# Allegro board gumstix_expansion_v1_3.brd
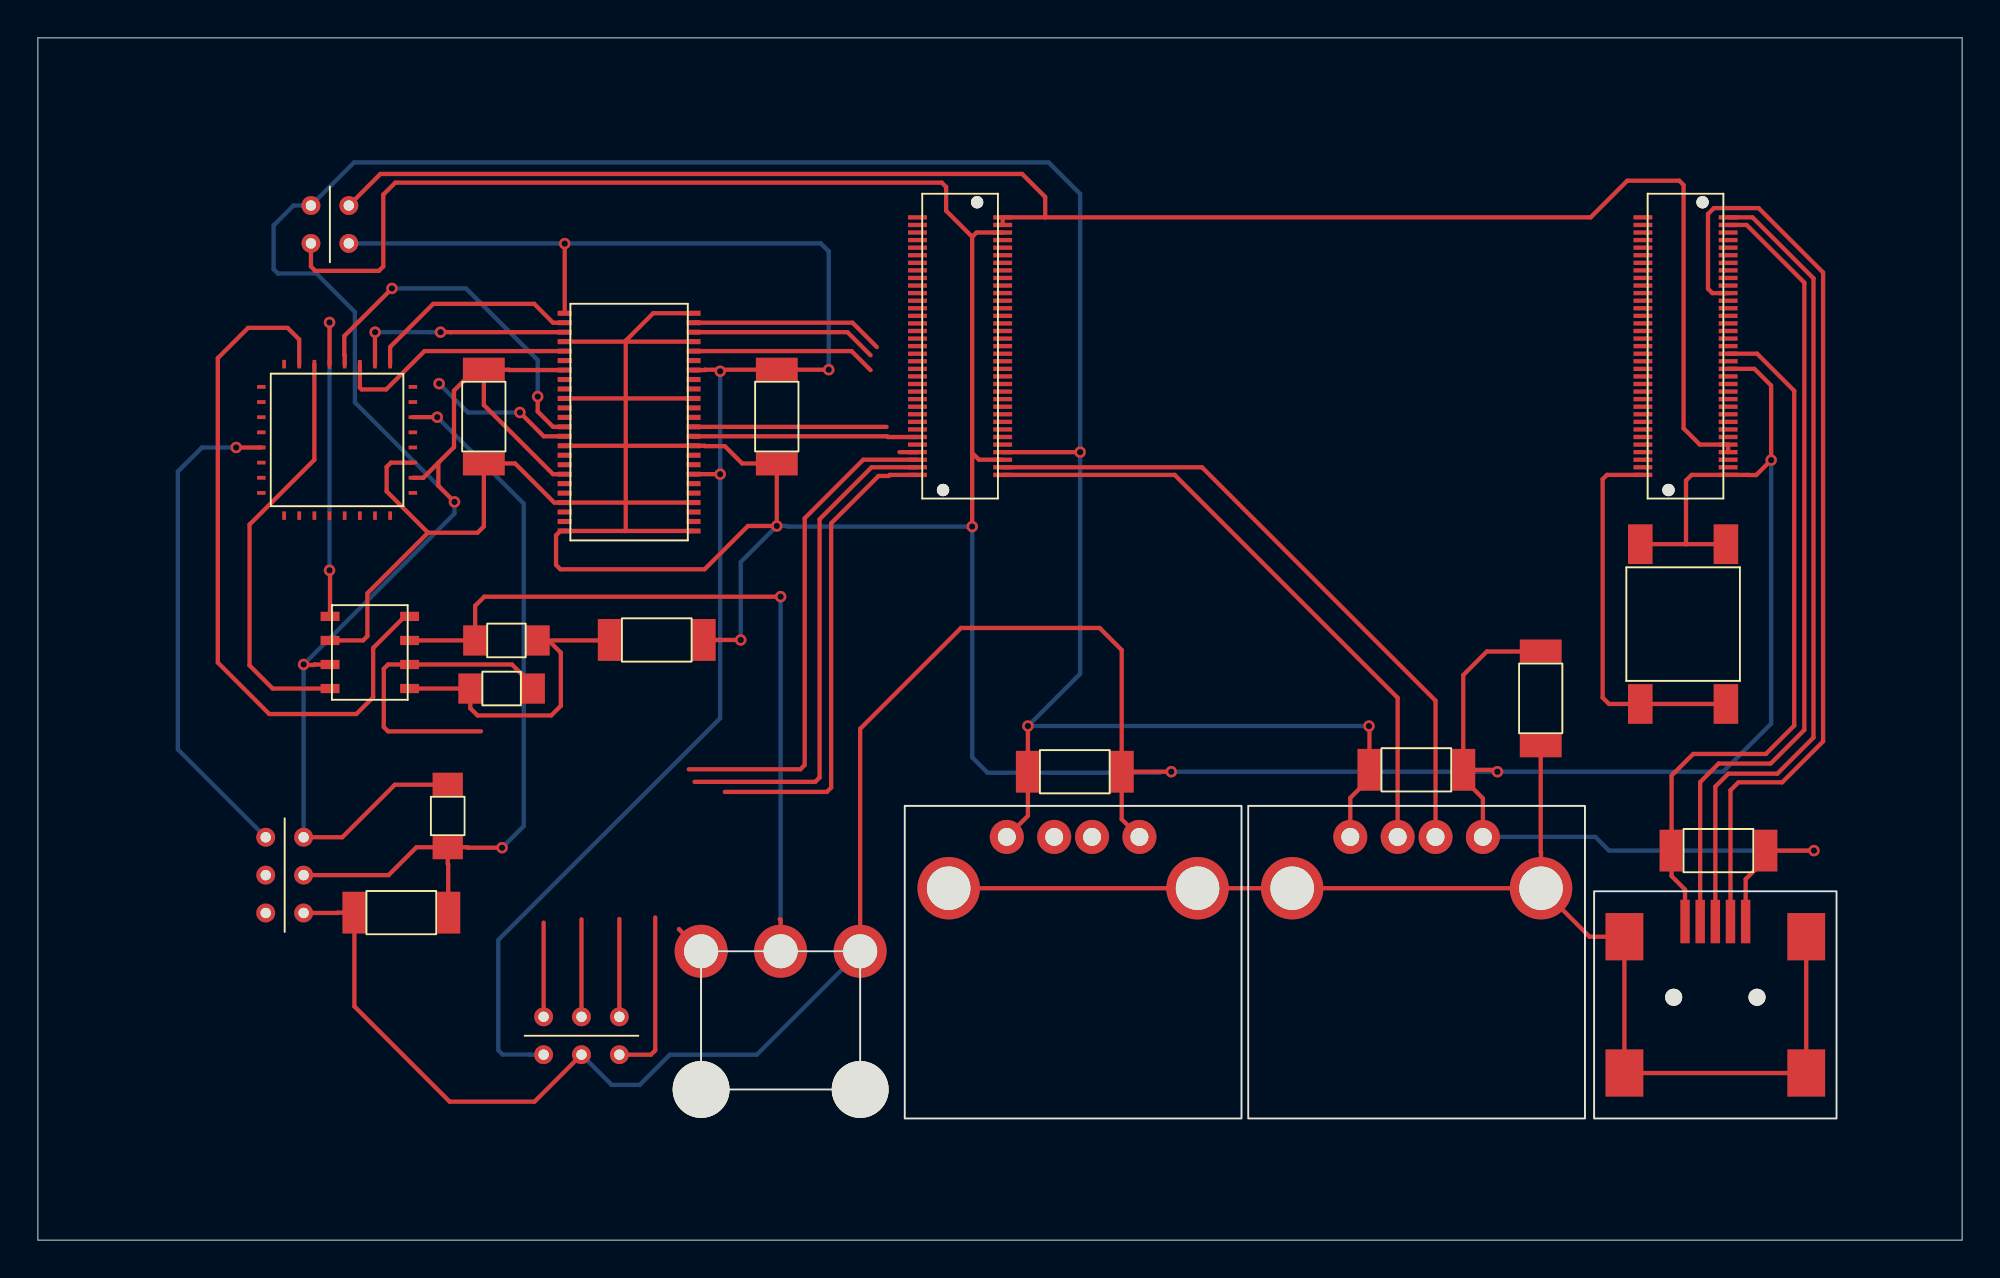
[diagram p0: board, top side]
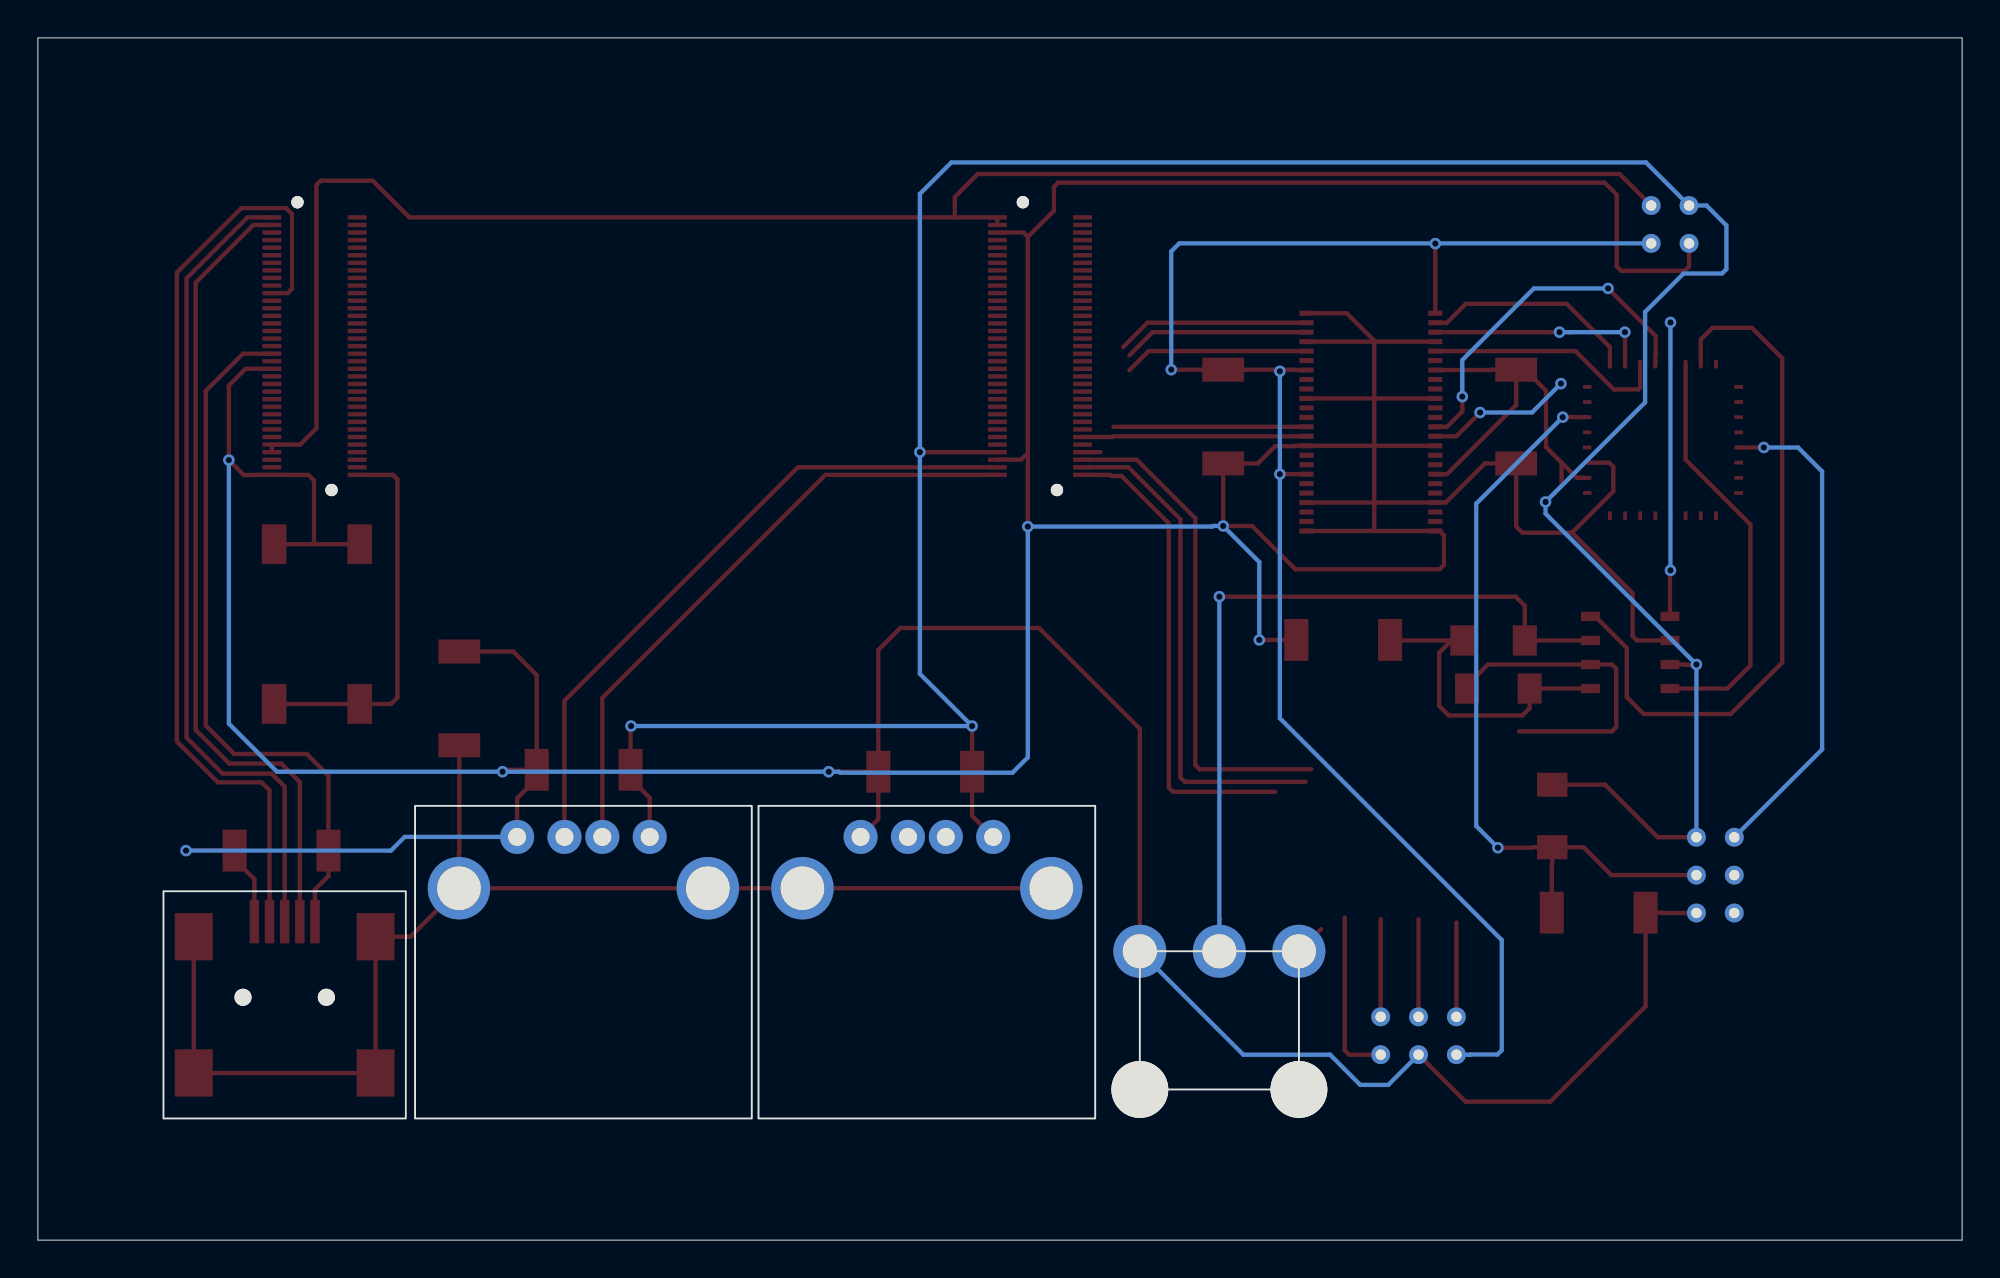
[diagram p1: board, bottom side, seen from below]

Outline 101.6 x 63.5 mm; copper layers: TOP, BOTTOM. Coordinates in mm from the lower left corner of the outline.
Outline path: 0,63.5 101.6,63.5 101.6,0 0,0 0,63.5

## Placement (name value [footprint] x y rotation side)
C1  4.7u  [SMDCAP]  72.72 24.84 180 top
C3  4.7u  [SMDCAP]  54.69 24.74 180 top
C5  4.7u  [SMDCAP]  88.67 20.57 180 top
C9  0.1u  [SMDCAP]  23.55 43.43 270 top
C10  0.1u  [SMDCAP]  39.01 43.43 270 top
C11  0.1u  [SMDCAP]  32.61 31.7 180 top
C12  0.1u  [SMDCAP]  19.25 17.3 0 top
C13  1n  [SMDCAP]  79.35 28.68 90 top
J1  GUMSTIX_J1  [GUMSTIX]  87 47.22 180 top
J2  GUMSTIX_J4  [GUMSTIX]  48.69 47.22 0 top
J3  4 HEADER  [DIP4_CONN]  15.42 53.64 180 top
J4  CON6  [USBA]  72.8 14.05 0 top
J6  CON6  [USBA]  54.66 14.05 0 top
J7  Background Header  [DIP6_CONN]  13.03 19.28 0 top
J10  CON6  [DIP6_CONN]  28.7 10.8 90 top
J11  CON3  [MOLEX_3]  39.22 11.61 0 top
J12  CON9  [MUSBA_TSMT]  88.57 12.83 90 top
R3  60  [SMDRES]  24.74 31.67 180 top
R4  60  [SMDRES]  24.49 29.13 180 top
R5  10k  [SMDRES]  21.64 22.4 90 top
S1  -  [SWITCH]  86.87 32.54 270 top
U1  MC9S08DZ60  [MC9S08_LQFP32]  15.8 42.27 180 top
U2  SN74LVC16T245  [SN74_DGG]  31.22 43.21 0 top
U3  TJA1040T  [TJA1040_SO8]  17.53 31.04 0 top

## Library data of the parts
C1 C3 C5 C9 C10 = C_elect_0
C11 C12 = C
C13 = C_elect_1
J1 = GUMSTIX_J1
J2 = GUMSTIX_J4
J3 = 4 HEADER
J4 J6 J10 = CON6
J7 = CONN MOD 6-6_J
J11 = CON3
J12 = CON9
R3-R5 = R
S1 = SWITCH
U1 = MC9S08DZ60
U2 = SN74LVC16T245
U3 = TJA1040T

## Footprints (pads in the part's own frame, mm; a bottom-side part is the same pattern mirrored in y, then rotated)
DIP4_CONN
  round 1 hole 0.55: 1(-1,1) 2(-1,-1) 3(1,-1) 4(1,1)
DIP6_CONN
  round 1 hole 0.55: 1(-1,2) 2(-1,0) 3(-1,-2) 4(1,-2) 5(1,0) 6(1,2)
GUMSTIX
  round 0.65 hole 0.65 unplated: (-0.9,-7.6) (0.9,7.6)
  rect 1x0.23 smd: 1(2.25,6.8) 2(2.25,6.4) 3(2.25,6) 4(2.25,5.6) 5(2.25,5.2) 6(2.25,4.8) 7(2.25,4.4) 8(2.25,4) 9(2.25,3.6) 10(2.25,3.2) 11(2.25,2.8) 12(2.25,2.4) 13(2.25,2) 14(2.25,1.6) 15(2.25,1.2) 16(2.25,0.8) 17(2.25,0.4) 18(2.25,0) 19(2.25,-0.4) 20(2.25,-0.8) 21(2.25,-1.2) 22(2.25,-1.6) 23(2.25,-2) 24(2.25,-2.4) 25(2.25,-2.8) 26(2.25,-3.2) 27(2.25,-3.6) 28(2.25,-4) 29(2.25,-4.4) 30(2.25,-4.8) 31(2.25,-5.2) 32(2.25,-5.6) 33(2.25,-6) 34(2.25,-6.4) 35(2.25,-6.8) 36(-2.25,-6.8) 37(-2.25,-6.4) 38(-2.25,-6) 39(-2.25,-5.6) 40(-2.25,-5.2) 41(-2.25,-4.8) 42(-2.25,-4.4) 43(-2.25,-4) 44(-2.25,-3.6) 45(-2.25,-3.2) 46(-2.25,-2.8) 47(-2.25,-2.4) 48(-2.25,-2) 49(-2.25,-1.6) 50(-2.25,-1.2) 51(-2.25,-0.8) 52(-2.25,-0.4) 53(-2.25,0) 54(-2.25,0.4) 55(-2.25,0.8) 56(-2.25,1.2) 57(-2.25,1.6) 58(-2.25,2) 59(-2.25,2.4) 60(-2.25,2.8) 61(-2.25,3.2) 62(-2.25,3.6) 63(-2.25,4) 64(-2.25,4.4) 65(-2.25,4.8) 66(-2.25,5.2) 67(-2.25,5.6) 68(-2.25,6) 69(-2.25,6.4) 70(-2.25,6.8)
MC9S08_LQFP32
  rect 0.45x0.2 smd: 1(-4,2.8) 2(-4,2) 3(-4,1.2) 4(-4,0.4) 5(-4,-0.4) 6(-4,-1.2) 7(-4,-2) 8(-4,-2.8) 17(4,-2.8) 18(4,-2) 19(4,-1.2) 20(4,-0.4) 21(4,0.4) 22(4,1.2) 23(4,2) 24(4,2.8)
  rect 0.2x0.45 smd: 9(-2.8,-4) 10(-2,-4) 11(-1.2,-4) 12(-0.4,-4) 13(0.4,-4) 14(1.2,-4) 15(2,-4) 16(2.8,-4) 25(2.8,4) 26(2,4) 27(1.2,4) 28(0.4,4) 29(-0.4,4) 30(-1.2,4) 31(-2,4) 32(-2.8,4)
MOLEX_3
  round 3 hole 3 unplated: (-4.2,-3.65) (4.2,-3.65)
  round 2.8 hole 1.8: 1(-4.2,3.65) 2(0,3.65) 3(4.2,3.65)
MUSBA_TSMT
  round 0.9 hole 0.9 unplated: (0,2.2) (0,-2.2)
  rect 2.3x0.5 smd: 1(4,1.6) 2(4,0.8) 3(4,0) 4(4,-0.8) 5(4,-1.6)
  rect 2.5x2 smd: 6(-4,4.8) 7(-4,-4.8) 8(3.2,-4.8) 9(3.2,4.8)
SMDCAP
  rect 1.27x2.21 smd: 1(-2.54,0) 2(2.413,0)
SMDRES
  rect 1.27x1.6 smd: 1(-1.651,0) 2(1.651,0)
SN74_DGG
  rect 0.75x0.27 smd: 1(-3.4,5.75) 2(-3.4,5.25) 3(-3.4,4.75) 4(-3.4,4.25) 5(-3.4,3.75) 6(-3.4,3.25) 7(-3.4,2.75) 8(-3.4,2.25) 9(-3.4,1.75) 10(-3.4,1.25) 11(-3.4,0.75) 12(-3.4,0.25) 13(-3.4,-0.25) 14(-3.4,-0.75) 15(-3.4,-1.25) 16(-3.4,-1.75) 17(-3.4,-2.25) 18(-3.4,-2.75) 19(-3.4,-3.25) 20(-3.4,-3.75) 21(-3.4,-4.25) 22(-3.4,-4.75) 23(-3.4,-5.25) 24(-3.4,-5.75) 25(3.4,-5.75) 26(3.4,-5.25) 27(3.4,-4.75) 28(3.4,-4.25) 29(3.4,-3.75) 30(3.4,-3.25) 31(3.4,-2.75) 32(3.4,-2.25) 33(3.4,-1.75) 34(3.4,-1.25) 35(3.4,-0.75) 36(3.4,-0.25) 37(3.4,0.25) 38(3.4,0.75) 39(3.4,1.25) 40(3.4,1.75) 41(3.4,2.25) 42(3.4,2.75) 43(3.4,3.25) 44(3.4,3.75) 45(3.4,4.25) 46(3.4,4.75) 47(3.4,5.25) 48(3.4,5.75)
SWITCH
  rect 2.1x1.3 smd: 1(-4.22,2.26) 2(-4.22,-2.26) 3(4.22,-2.26) 4(4.22,2.26)
TJA1040_SO8
  rect 1x0.49 smd: 1(-2.1,1.905) 2(-2.1,0.635) 3(-2.1,-0.635) 4(-2.1,-1.905) 5(2.1,-1.905) 6(2.1,-0.635) 7(2.1,0.635) 8(2.1,1.905)
USBA
  round 3.3 hole 2.3 unplated: (-6.57,4.54) (6.57,4.54)
  round 1.8 hole 0.95: 1(-3.5,7.25) 2(-1,7.25) 3(1,7.25) 4(3.5,7.25)

## Nets
GND: C1.1(+) C3.1(+) C5.1(+) C9.2(-) C10.2(-) C11.1 C12.1 C13.2(-) J1.56(GND#56) J1.70(GND#70) J2.3(GND#3) J2.33(GND#33) J3.4 J4.4 J6.4 J7.4(2) J10.2 J11.3 J12.5 S1.1 S1.2 U1.3(VSS) U2.4(GND#4) U2.10(GND#10) U2.15(GND#15) U2.21(GND#21) U2.24(2DIR) U2.25(2OEN) U2.28(GND#28) U2.34(GND#34) U2.39(GND#39) U2.45(GND#45) U2.48(1OEN) U3.2(GND)
VCC_1.8: C10.1(+) J3.1 J10.1 U2.1(1DIR) U2.31(VCCA#31) U2.42(VCCA#42)
VCC_3.3: J1.66(VSYSTEM#66) J1.67(VSYSTEM#67) J2.1(VSYSTEM#1) J2.2(VSYSTEM#2) J3.2
BKGD: J7.1 U1.21(BKGD/MS)
CANH: J11.2 R3.2 U3.7(CANH)
CANL: J11.1 R4.1 U3.6(CANL)
COMMON_SHIELD: C13.1(+) J12.6 J12.7 J12.8 J12.9
GPIO18: J2.38(GPIO23_MMC3_DAT5) J10.3
GPIO19: J2.36(GPIO19_MMC3_D1) J10.4
GPIO20: J2.39(GPIO20_MMC3_D2) J10.5
GPIO21: J2.37(GPIO22_MMC3_DAT6) J10.6
GPIO165_IR_RXD3: J1.31(GPIO165_IR_RXD3)
GPIO166_IR_TXD3: J1.26(GPIO166_IR_TXD3)
RESET: C12.2 J7.5(4) R5.1 U1.6(RESETN)
RXCAN: U1.14(PTE7/RXD2/RXCAN) U3.4(RXD)
SPI_CLOCK_1.8V: J2.43(GPIO171_SPI1_CLK) U2.46(1A2)
SPI_CLOCK_5V: U1.10(PTE3/SPSCK) U2.3(1B2)
SPI_CS_1.8V: J2.42(GPIO175_SPI1_CS1) U2.47(1A1)
SPI_CS_5V: U1.9(PTE2/SSN) U2.2(1B1)
SPI_INTERRUPT_1.8V: J2.41(GPIO114_SPI1_NIRQ) U2.35(2A2)
SPI_INTERRUPT_5V: U1.22(PTB0/PIB0/ADP8) U2.14(2B2)
SPI_MISO_1.8V: J2.45(GPIO173_SPI1_MISO) U2.36(2A1)
SPI_MISO_5V: U1.12(PTE5/SDA/MISO) U2.13(2B1)
SPI_MOSI_1.8V: J2.44(GPIO172_SPI1_MOSI) U2.44(1A3)
SPI_MOSI_5V: U1.11(PTE4/SCL/MOSI) U2.5(1B3)
STB: U1.15(PTD0/PID0/TPM2CH0) U3.8(STB)
TXCAN: U1.13(PTE6/TXD2/TXCAN) U3.1(TXD)
USB_OTG_DM: J1.37(USBOTG_DM) J12.2
USB_OTG_DP: J1.36(USBOTG_DP) J12.3
USB_OTG_ID: J1.46(USBOTG_ID) J12.4
USB_OTG_VBUS: C5.2(-) J1.54(USBOTG_VBUS) J12.1
USBH_DM: J2.35(USBH_DM) J4.2
USBH_DP: J2.34(USBH_DP) J4.3
USBH_VBUS: C1.2(-) C3.2(-) C9.1(+) J2.32(USBH_VBUS) J3.3 J4.1 J6.1 J7.6 R5.2 U1.2(VDD) U2.7(VCCB#7) U2.18(VCCB#18) U3.3(VCC)
N03550: J1.1(NRESPWRON) S1.3 S1.4
N10323: C11.2 R3.1 R4.2 U3.5(SPLIT)

Pads without a net: J1 2 3 4 5 6 7 8 9 10 11 12 13 14 15 16 17 18 19 20 21 22 23 24 25 27 28 29 30 32 33 34 35 38 39 40 41 42 43 44 45 47 48 49 50 51 52 53 55 57 58 59 60 61 62 63 64 65 68 69; J2 4 5 6 7 8 9 10 11 12 13 14 15 16 17 18 19 20 21 22 23 24 25 26 27 28 29 30 31 40 46 47 48 49 50 51 52 53 54 55 56 57 58 59 60 61 62 63 64 65 66 67 68 69 70; J6 2 3; J7 2 3; U1 1 4 5 7 8 16 17 18 19 20 23 24 25 26 27 28 29 30 31 32; U2 6 8 9 11 12 16 17 19 20 22 23 26 27 29 30 32 33 37 38 40 41 43

## Via types
v1: diameter 0.61, hole 0.33, TOP to BOTTOM, 28 vias

## Routing (per net, layer and track width the routed paths; a pad name or vN(x,y) marks a point on that pad's centre or on a via; arc(x,y) is an arc through that point)
GND: length 388.8
  TOP w0.229: U1.3 18.64,41.07 18.41,40.84 18.41,39.55 20.6,37.36 ; 87.02,36.76 87.02,40.12 87.32,40.42 J1.70 90.29,40.42 90.3,40.41 90.73,40.41 v1(91.52,41.2) 91.52,45.14 90.63,46.02 J1.56 ; 87.02,36.76 S1.1 ; 87.02,36.76 S1.2 ; 49.33,52.99 47.96,54.37 47.96,55.63 47.73,55.85 18.87,55.85 18.24,55.22 18.24,51.43 18.01,51.2 14.65,51.2 14.42,51.43 J3.4 ; 49.33,52.99 49.33,41.57 ; 49.33,52.99 49.56,53.22 J2.3 ; J11.3 43.42,27.01 48.74,32.33 56.06,32.33 57.23,31.17 C3.1 ; U2.48 32.49,48.96 31.04,47.51 31.04,47.46 ; 27.79,47.46 U2.4 31.04,47.46 ; J2.33 49.69,41.22 49.33,41.57 ; 20.6,37.36 23.22,37.36 23.55,37.69 23.55,41.02 25.2,41.02 27.26,38.96 U2.21 31.04,38.96 ; 20.6,37.36 17.4,34.16 17.4,31.9 17.17,31.67 U3.2 ; J4.4 76.3,23.33 75.26,24.37 C1.1 ; 31.04,41.96 U2.34 35.21,41.96 35.23,41.94 36.27,41.94 37.19,41.02 39.01,41.02 v1(39.01,37.72) 37.49,37.72 35.2,35.43 27.59,35.43 27.36,35.66 27.36,37.23 27.59,37.46 U2.24 30.99,37.46 ; 31.04,41.96 U2.15 ; 31.04,41.96 31.04,38.96 ; 31.04,41.96 31.04,44.46 ; C1.1 76.96,24.84 v1(77.06,24.74) ; C1.1 75.26,29.84 76.5,31.09 C13.2 ; J6.4 57.23,22.23 C3.1 ; 31.04,47.46 31.04,44.46 ; 31.04,47.46 U2.45 ; 31.04,44.46 U2.10 27.79,44.46 ; 31.04,44.46 U2.39 ; 31.04,38.96 U2.28 ; 31.04,38.96 31.04,37.51 30.99,37.46 ; v1(93.78,20.57) C5.1 91.21,20.1 90.17,19.06 J12.5 ; J10.2 26.22,7.32 21.74,7.32 16.71,12.34 C12.1 15.84,17.3 15.82,17.28 J7.4 ; U2.25 30.99,37.46 ; C3.1 v1(59.84,24.74) ; 49.33,41.57 v1(49.33,37.69) ; C11.1 v1(37.11,31.7)
  BOTTOM w0.229: J10.2 30.3,8.2 31.78,8.2 33.37,9.8 37.95,9.8 J11.3 ; v1(91.52,41.2) 91.52,27.28 88.98,24.74 v1(77.06,24.74) v1(59.84,24.74) 59.3,24.74 59.25,24.69 50.14,24.69 49.33,25.5 v1(49.33,37.69) 39.59,37.69 39.56,37.72 v1(39.01,37.72) 37.11,35.81 v1(37.11,31.7) ; J4.4 82.23,21.3 82.96,20.57 v1(93.78,20.57)
VCC_1.8: length 87.4
  TOP w0.229: U2.31 v1(36.02,40.46) ; 36.11,45.97 C10.1 v1(41.76,45.97) ; 36.11,45.97 v1(36.02,45.89) ; 36.11,45.97 35.23,45.97 35.21,45.96 U2.42 34.59,45.96 ; U2.1 v1(27.82,52.63)
  BOTTOM w0.229: v1(41.76,45.97) 41.76,52.22 41.34,52.64 27.83,52.64 ; v1(36.02,45.89) v1(36.02,40.46) 36.02,27.57 24.31,15.85 24.31,10.03 24.54,9.8 25.95,9.8 25.96,9.8 J10.1 ; 27.83,52.64 v1(27.82,52.63) ; 27.83,52.64 J3.1
VCC_3.3: length 92.2
  TOP w0.229: 53.19,54.02 J2.1 J2.2 ; 53.19,54.02 53.19,55.09 51.97,56.31 18.08,56.31 J3.2 ; 53.19,54.02 81.98,54.02 83.92,55.96 86.66,55.96 86.89,55.73 86.89,42.88 87.75,42.02 J1.66 J1.67
BKGD: length 26.2
  TOP w0.229: U1.21 v1(10.47,41.87)
  BOTTOM w0.229: v1(10.47,41.87) 8.66,41.87 7.39,40.6 7.39,25.92 J7.1
CANH: length 42.1
  TOP w0.229: v1(39.22,33.99) 23.57,33.99 23.09,33.5 R3.2 U3.7 ; 39.17,16.95 39.22,16.9 J11.2
  BOTTOM w0.229: v1(39.22,33.99) J11.2
CANL: length 18.5
  TOP w0.229: J11.1 33.86,16.42 33.85,16.42 ; R4.1 26.14,29.3 25.03,30.4 U3.6 18.49,30.4 18.26,30.18 18.26,27.1 18.49,26.87 23.39,26.87
COMMON_SHIELD: length 68.3
  TOP w0.229: 79.37,18.59 81.93,16.03 J12.9 J12.6 J12.7 J12.8 ; 79.37,18.59 79.37,20.48 79.35,20.49 C13.1 ; 79.37,18.59 48.09,18.59
GPIO18: length 35.5
  TOP w0.229: J2.38 43.58,41.22 40.49,38.13 40.49,25.1 40.26,24.87 34.37,24.87 ; 32.6,17.04 32.6,10.02 32.37,9.8 J10.3
GPIO19: length 30.4
  TOP w0.229: 36.27,23.67 41.66,23.67 41.88,23.9 41.88,37.86 44.39,40.36 44.92,40.36 44.98,40.42 J2.36 ; J10.4 30.7,16.96
GPIO20: length 6.1
  TOP w0.229: J2.39 45.49,41.62 ; J10.5 28.7,16.94
GPIO21: length 31.6
  TOP w0.229: J2.37 44.02,40.82 41.27,38.07 41.27,24.43 41.05,24.21 34.67,24.21 ; J10.6 26.7,16.77
RESET: length 41
  TOP w0.229: J7.5 18.52,19.28 19.99,20.75 R5.1 ; v1(24.51,20.73) 22.71,20.73 22.68,20.75 R5.1 ; U1.6 v1(21.09,43.47) ; R5.1 21.64,19.88 21.67,19.85 C12.2
  BOTTOM w0.229: v1(21.09,43.47) 25.65,38.9 25.65,21.87 v1(24.51,20.73)
RXCAN: length 22.1
  TOP w0.229: U1.14 14.6,41.22 11.18,37.8 11.18,30.35 12.4,29.13 U3.4
SPI_CLOCK_1.8V: length 9.9
  TOP w0.229: U2.46 42.75,47.96 43.97,46.74
SPI_CLOCK_5V: length 11.7
  TOP w0.229: v1(21.26,47.96) 21.81,47.96 U2.3 ; U1.10 17.8,47.95 v1(17.81,47.96)
  BOTTOM w0.229: v1(21.26,47.96) 20.71,47.96 v1(17.81,47.96)
SPI_CS_1.8V: length 10.2
  TOP w0.229: U2.47 43.01,48.46 44.3,47.17
SPI_CS_5V: length 11.5
  TOP w0.229: U2.2 27.2,48.46 26.2,49.45 20.88,49.45 18.6,47.17 U1.9
SPI_INTERRUPT_1.8V: length 11.9
  TOP w0.229: 34.59,42.46 U2.35 44.84,42.46 44.88,42.42 J2.41
SPI_INTERRUPT_5V: length 7.8
  TOP w0.229: v1(25.45,43.71) 26.71,42.46 U2.14
  BOTTOM w0.229: v1(25.45,43.71) 22.71,43.71 v1(21.18,45.24)
SPI_MISO_1.8V: length 10.2
  TOP w0.229: 44.81,42.96 U2.36 34.59,42.96
SPI_MISO_5V: length 18.8
  TOP w0.229: v1(18.69,50.27) 16.18,47.75 16.18,46.75 16.2,46.73 U1.12 ; U2.13 27.2,42.96 26.39,43.76 v1(26.39,44.55)
  BOTTOM w0.229: v1(26.39,44.55) 26.39,46.48 22.61,50.27 v1(18.69,50.27)
SPI_MOSI_1.8V: length 9.8
  TOP w0.229: U2.44 42.96,46.96 43.97,45.95
SPI_MOSI_5V: length 12.9
  TOP w0.229: U1.11 17,45.03 17.09,44.93 18.39,44.93 20.41,46.96 U2.5
STB: length 37.5
  TOP w0.229: U1.15 13.8,47.57 13.18,48.18 11.1,48.18 9.5,46.58 9.5,30.51 12.22,27.79 16.81,27.79 17.7,28.68 17.7,31.28 19.37,32.94 U3.8
TXCAN: length 17.9
  TOP w0.229: U3.1 15.43,35.53 ; U1.13 v1(15.4,48.47)
  BOTTOM w0.229: v1(15.4,48.47) v1(15.4,35.38)
USB_OTG_DM: length 42.9
  TOP w0.229: J12.2 87.77,24.19 88.75,25.17 91.49,25.17 93.27,26.95 93.27,50.57 90.22,53.62 J1.37
USB_OTG_DP: length 43.5
  TOP w0.229: J1.36 90.53,54.02 93.75,50.8 93.75,26.54 91.85,24.64 89.26,24.64 88.57,23.95 J12.3
USB_OTG_ID: length 50.4
  TOP w0.229: J12.4 89.37,23.76 89.79,24.18 92.1,24.18 94.26,26.34 94.26,51.1 90.86,54.51 88.49,54.51 88.18,54.2 88.18,50.25 88.41,50.02 J1.46
USB_OTG_VBUS: length 37.6
  TOP w0.229: J1.54 90.77,46.82 92.74,44.86 92.74,27.18 91.24,25.68 87.4,25.68 86.26,24.54 C5.2 86.26,19.23 86.97,18.52 J12.1
USBH_DM: length 33.1
  TOP w0.229: J2.35 60.02,40.42 71.8,28.64 J4.2
USBH_DP: length 35.2
  TOP w0.229: J4.3 73.8,28.49 61.47,40.82 J2.34
USBH_VBUS: length 181.7
  TOP w0.229: 21.15,41.06 20.35,40.27 U1.2 ; 21.15,41.06 21.97,41.88 21.97,44.87 23.08,45.97 C9.1 ; 21.15,41.06 21.15,39.84 v1(22,38.99) ; U3.3 14.6,30.4 14.58,30.38 14.06,30.38 v1(14.03,30.4) ; C9.1 24.87,45.97 24.89,45.96 U2.7 ; C9.1 23.55,44.11 27.2,40.46 U2.18 ; J2.32 v1(55.03,41.62) ; v1(52.27,27.15) C3.2 52.27,22.41 J6.1 ; v1(70.28,27.15) 70.28,27.03 70.31,27 C1.2 70.31,24.37 69.3,23.36 J4.1 ; J7.6 16.07,21.28 18.85,24.05 R5.2
  BOTTOM w0.229: J7.6 v1(14.03,30.4) 22,38.37 v1(22,38.99) 16.74,44.25 16.74,49.02 14.71,51.05 12.67,51.05 12.45,51.28 12.45,53.59 13.5,54.64 J3.3 16.69,56.92 53.37,56.92 55.03,55.26 v1(55.03,41.62) 55.03,29.91 v1(52.27,27.15) v1(70.28,27.15)
N03550: length 20.4
  TOP w0.229: S1.4 S1.3 82.96,28.32 82.62,28.65 82.62,40.19 82.85,40.42 J1.1
N10323: length 17.8
  TOP w0.229: 26.11,31.65 26.99,31.65 27.61,31.03 27.61,28.22 27.1,27.71 23.22,27.71 22.83,28.09 R4.2 U3.5 ; R3.1 30.18,31.67 C11.2
